# Altium PCB 8810.PcbDoc (part 2 of 2)
Units mm, origin at the board's own origin, x right, y up, seen from the top; angles counter-clockwise.
Board outline 295 x 220 mm, 2 copper layers (Top Layer, Bottom Layer); 156 components, 133 nets, 555 pads, 13 vias.
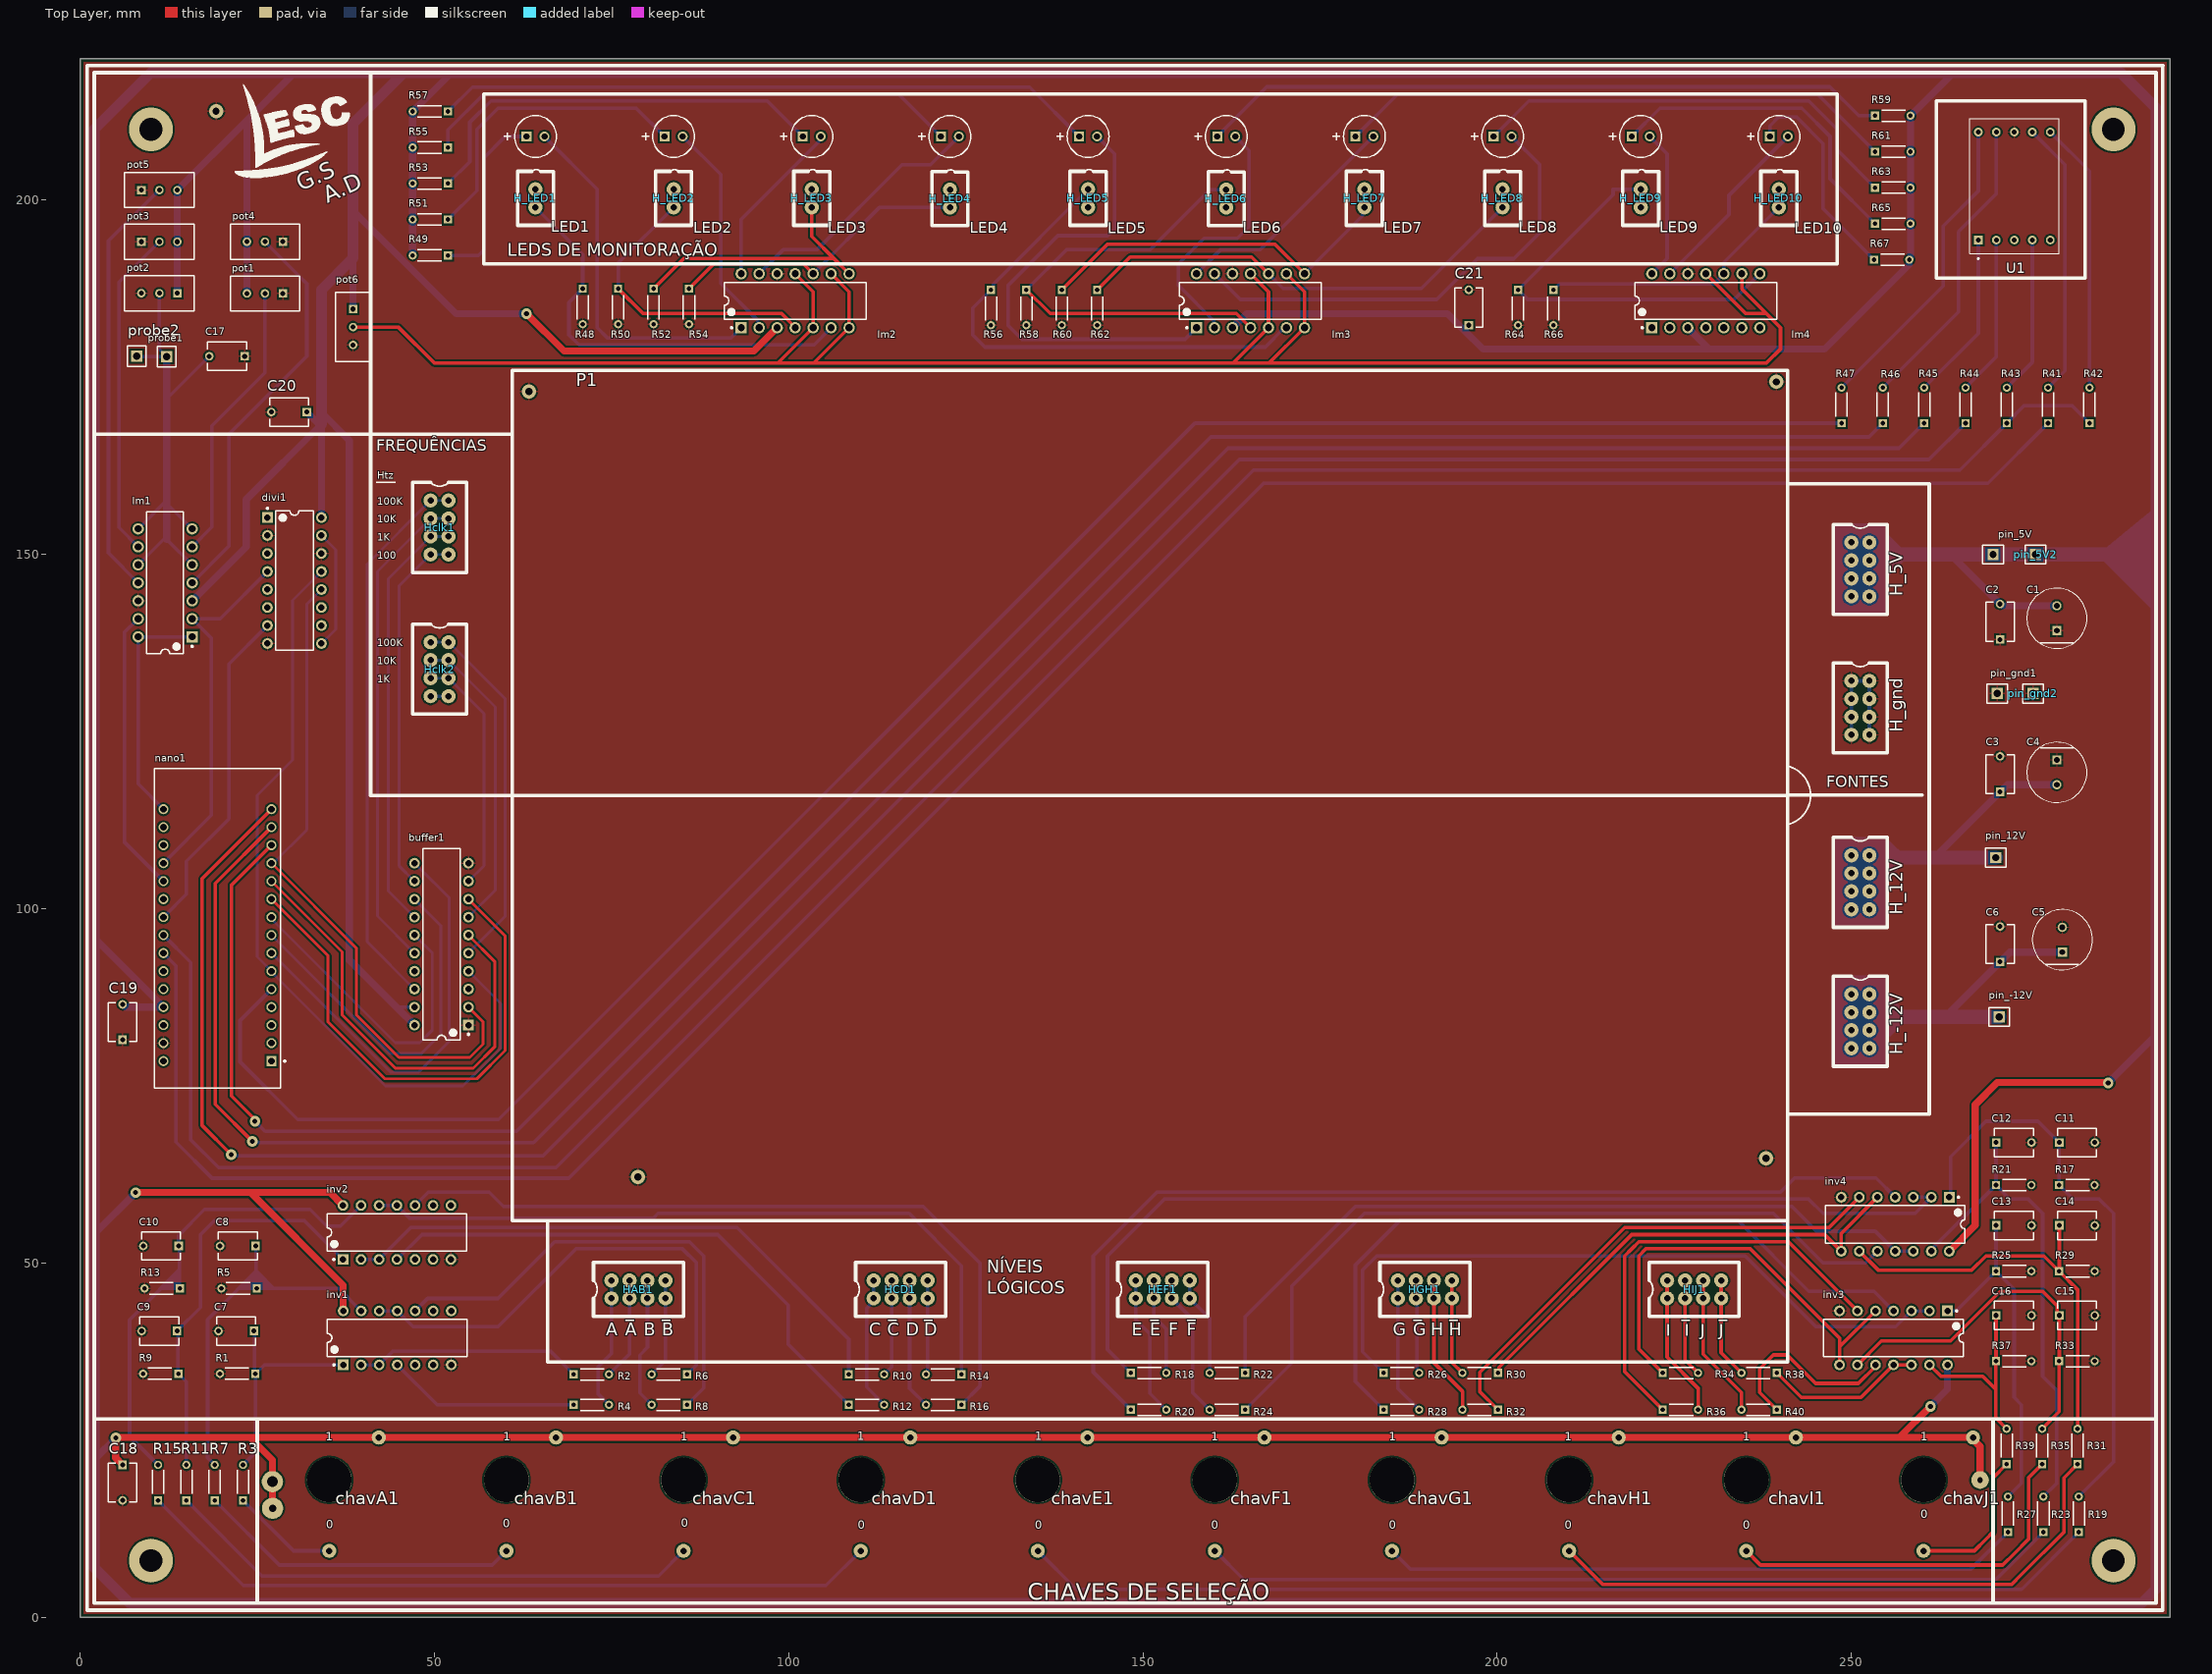
[diagram p0: Top Layer view]

## Silkscreen, mask and mechanical layers (free items; w line width, h text height) (continued)
Top Overlay: (continued)
  text "100K" at 41.953,137.03 h1
  text "10K" at 41.953,134.485 h1
  text "1K" at 41.953,131.939 h1
  text "FONTES" at 246.455,116.61 h2.8
  text "NÍVEIS" at 128,48.036 h3
  text "LÓGICOS" at 128,45.036 h3
  text "_" at 119.149,41.694 h3
  text "_" at 226.041,41.697 h3
  text "_" at 77.021,41.693 h3
  text "_" at 82.132,41.693 h3
  text "_" at 114.039,41.693 h3
  text "_" at 151.072,41.693 h3
  text "_" at 156.24,41.686 h3
  text "_" at 188.176,41.693 h3
  text "_" at 193.231,41.693 h3
  text "_" at 231.292,41.693 h3
  text "C" at 111.391,39.155 h3
  text "C" at 113.94,39.155 h3
  text "G" at 185.27,39.163 h3
  text "G" at 188.112,39.155 h3
  text "J" at 228.674,39.155 h3
  text "J" at 231.27,39.155 h3
  text "A" at 74.239,39.122 h3
  text "A" at 76.92,39.122 h3
  text "B" at 79.567,39.122 h3
  text "B" at 82.096,39.122 h3
  text "D" at 116.547,39.122 h3
  text "D" at 119.096,39.122 h3
  text "E" at 148.467,39.122 h3
  text "E" at 151.03,39.122 h3
  text "F" at 153.618,39.122 h3
  text "F" at 156.182,39.122 h3
  text "H" at 190.645,39.122 h3
  text "H" at 193.194,39.122 h3
  text "I" at 223.843,39.122 h3
  text "I" at 226.439,39.122 h3
  text "1" at 109.738,24.579 h2
  text "1" at 134.764,24.579 h2
  text "1" at 34.657,24.55 h2
  text "1" at 59.759,24.55 h2
  text "1" at 84.733,24.55 h2
  text "1" at 159.674,24.55 h2
  text "1" at 184.71,24.55 h2
  text "1" at 209.517,24.55 h2
  text "1" at 234.688,24.55 h2
  text "1" at 259.77,24.55 h2
  text "0" at 259.77,13.547 h2
  text "0" at 84.797,12.343 h2
  text "0" at 59.71,12.222 h2
  text "0" at 34.704,12.141 h2
  text "0" at 109.762,12.06 h2
  text "0" at 134.764,12.06 h2
  text "0" at 159.674,12.06 h2
  text "0" at 184.71,12.06 h2
  text "0" at 209.517,12.06 h2
  text "0" at 234.688,12.06 h2
  text "CHAVES DE SELEÇÃO" at 133.776,1.658 h4
Bottom Overlay:
  drawing of 7 lines, arcs and shapes, not listed
  text "Feito Pro:" at 185.972,71.159 h2
  text "Gustavo seabra / Arthur Damasceno" at 185.363,64.261 h4
Board Outline:
  the board outline again, w0.5